# EAGLE board OldBoard (EAGLE 5.07)
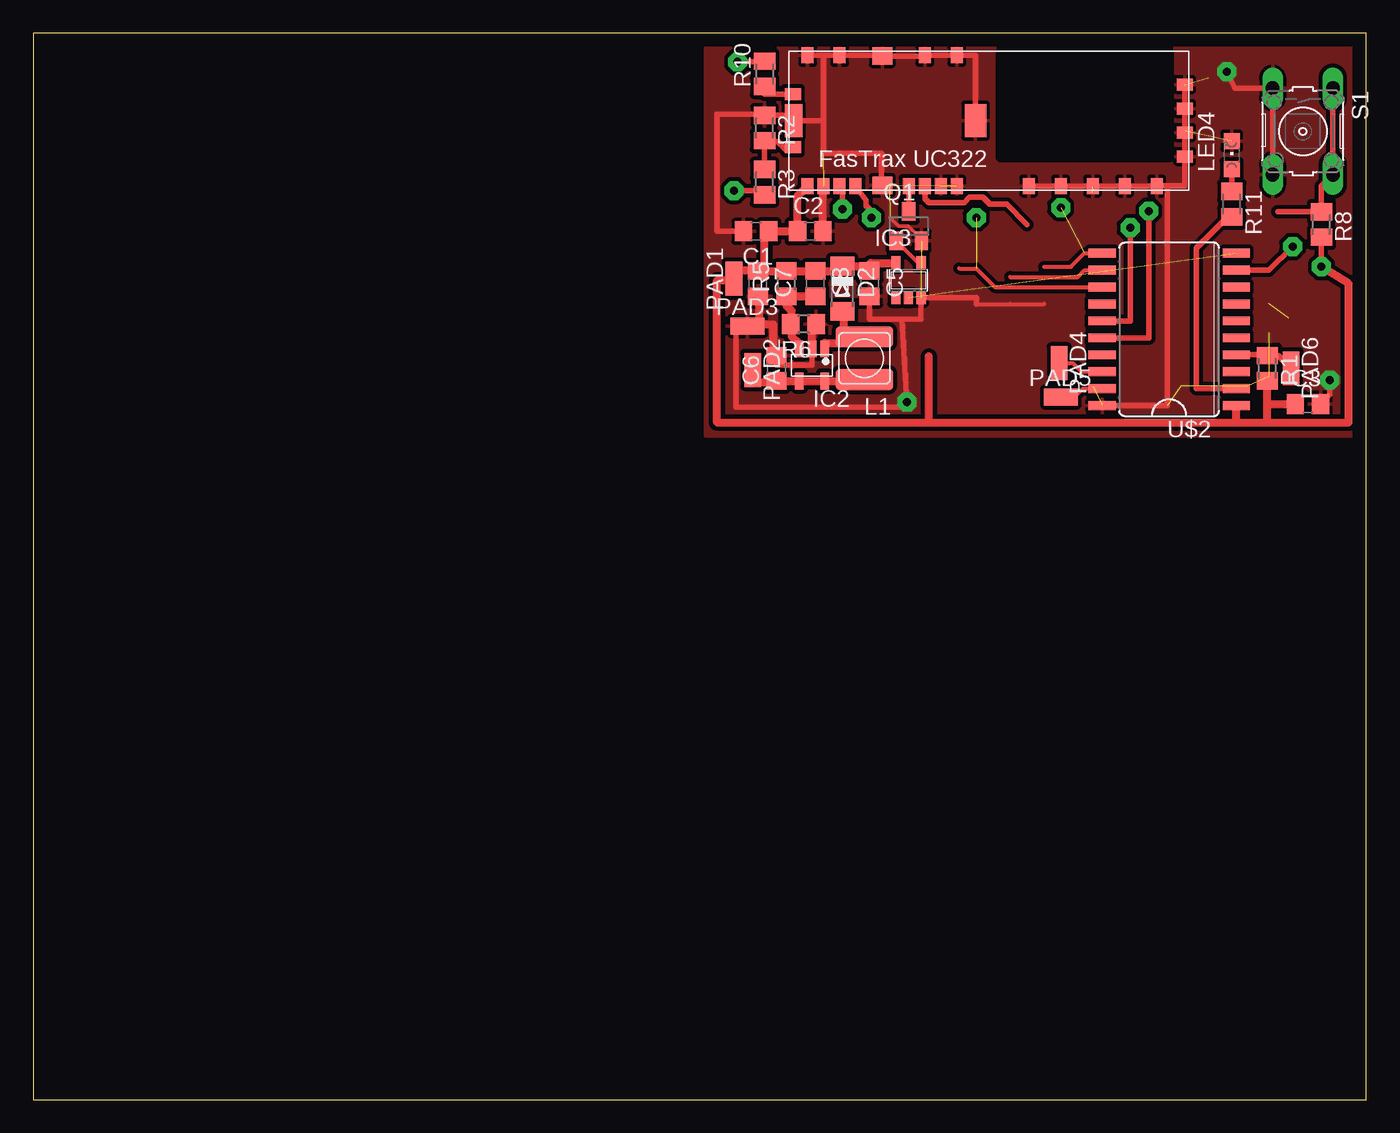
[diagram p0: board, top side]
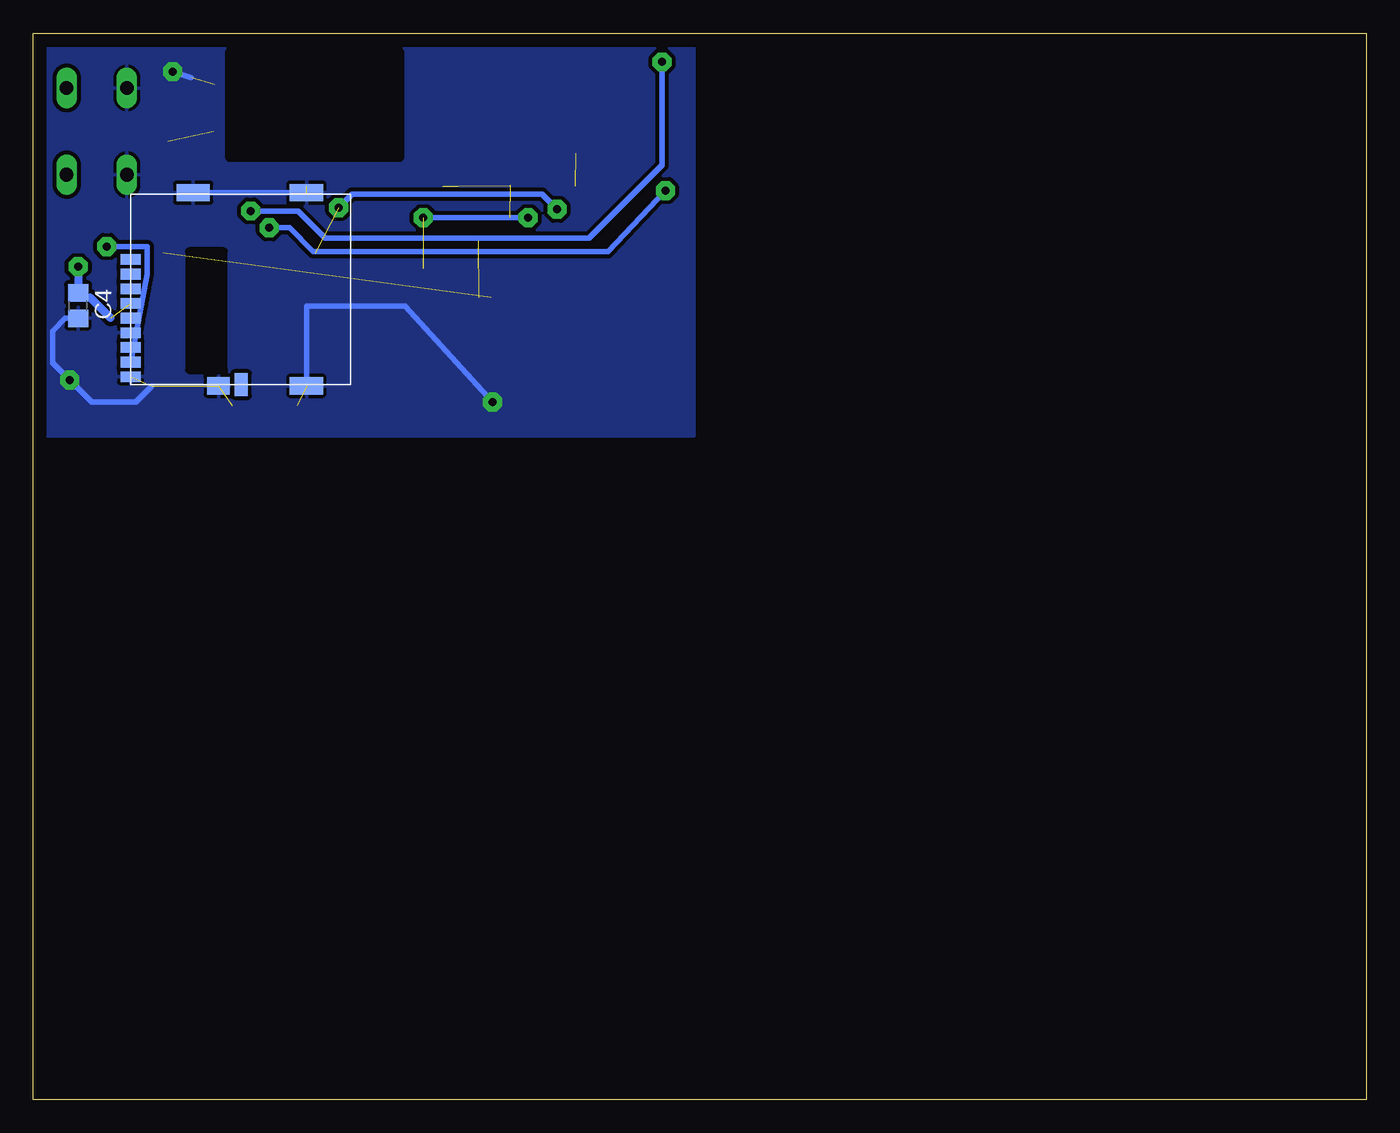
[diagram p1: board, bottom side, seen from below]

Size 100 x 80 mm. Coordinates in mm from the lower left corner, seen from the top.
Outline: 0,0 100,0 100,80 0,80 0,0
Copper layers (1*16): Top 0.035mm / dielectric 1.5mm / Bottom 0.035mm
Design rules "default *": minimum track width 12mil, minimum drill 0.6mm, track to track 12mil, track to pad 12mil, pad to pad 12mil, via to via 12mil, smd to smd 12mil, copper to edge 40mil, drill to drill 8mil, minimum pad ring 10mil, minimum via ring 8mil, stop-mask expansion 4mil, vias tented up to drill 0mil, thermal gap 10mil

## Footprints (pad centres in the part's own frame; a part is rotated, then mirrored left to right if it is on the bottom)
C0805 = smd 1.3 x 1.5: 1 -0.95,0; 2 0.95,0
MINIMELF = smd 1.4 x 1.8: A 1.7,0; C -1.7,0
SOT23-5 = smd 0.635 x 1.27: P$1 -0.953,-1.206; P$2 0,-1.206; P$3 0.953,-1.206; P$4 0.953,1.206; P$5 -0.953,1.206
SOT23-5' = smd 0.69 x 0.99: 1 -0.95,-1.29; 2 0,-1.29; 3 0.95,-1.29; 4 0.95,1.3; 5 -0.95,1.3
WE-TPC = smd 4.3 x 1.6: P$1 0,1.6; P$2 0,-1.6
CHIPLED_0805 = smd 1.2 x 1.2: A 0,-1.05; C 0,1.05
SMD1,27-2,54 = smd 1.27 x 2.54: 1 0,0
SOT23 = smd 1 x 1.4: 1 -0.95,-1.1; 2 0.95,-1.1; 3 0,1.1
M0805 = smd 1.3 x 1.6: 1 -0.95,0; 2 0.95,0
R0805 = smd 1.3 x 1.5: 1 -0.95,0; 2 0.95,0
B3F-10XX = drill 1.016 long: 1 -3.251,2.261; 2 3.251,2.261; 3 -3.251,-2.261; 4 3.251,-2.261
FASTRAXUC322 = smd 0.9 x 1.2: 1 1.7,0.6; 2 2.9,0.6; 3 4.1,0.6; 4 5.3,0.6; 6 9.3,0.6; 7 10.5,0.6; 8 11.7,0.6; 9 12.9,0.6; 11 18.3,0.6; 12 20.7,0.6; 13 23.1,0.6; 14 25.5,0.6; 15 27.9,0.6; 20 12.9,10.4; 21 10.5,10.4; 23 4.1,10.4; 24 1.7,10.4 | smd 1.5 x 1.3: 5 7.3,0.65; 22 7.3,10.35 | smd 1.6 x 2.5: 10 14.3,5.5 | smd 1.2 x 0.9: 16 30,2.8; 17 30,4.6; 18 30,6.4; 19 30,8.2; 25 0.6,7.5; 27 0.6,3.5 | smd 1.3 x 2.5: 26 0.65,5.5
SO20W = smd 0.66 x 2.032: 1 -5.715,-5.029; 2 -4.445,-5.029; 3 -3.175,-5.029; 4 -1.905,-5.029; 5 -0.635,-5.029; 6 0.635,-5.029; 7 1.905,-5.029; 8 3.175,-5.029; 9 4.445,-5.029; 10 5.715,-5.029; 11 5.715,5.029; 12 4.445,5.029; 13 3.175,5.029; 14 1.905,5.029; 15 0.635,5.029; 16 -0.635,5.029; 17 -1.905,5.029; 18 -3.175,5.029; 19 -4.445,5.029; 20 -5.715,5.029
MIKRO_SD_CARD_HOLDER = smd 1.7 x 1: C_DETECT1 14.3,8.3 | smd 0.8 x 1.5: C_DETECT2 13.71,0; P1 4.91,0; P2 6.01,0; P3 7.11,0; P4 8.21,0; P5 9.31,0; P6 10.41,0; P7 11.51,0; P8 12.61,0 | smd 1.3 x 2.5: CASE1 -0.1,4.7; CASE2 -0.1,13.2; CASE3 14.4,13.2 | smd 1.3 x 1.7: CASE4 14.4,6.6

## Placement (x,y rotation side)
C1  4.7uF  [C0805]  54.23,65.15 180 top
C2  10nF  [C0805]  58.29,65.15 0 top
C3  100nF  [C0805]  95.63,52.2 0 top
C4  100nF  [C0805]  96.65,59.56 270 bottom
C5  100nF  [C0805]  62.74,61.21 270 top
C6  4µ7 (ker)  [C0805]  55.75,54.86 90 top
C7  4µ7 (ker)  [C0805]  54.36,61.21 270 top
C8  1n  [C0805]  58.67,61.21 270 top
D2  [MINIMELF]  60.71,60.83 270 top
IC2  XC9119D10A  [SOT23-5]  58.42,55.12 180 top
IC3  74LVC1G04DBV  [SOT23-5']  65.66,61.47 0 top
L1  10u  [WE-TPC]  62.36,55.63 180 top
LED4  [CHIPLED_0805]  89.92,70.87 0 top
PAD1  [SMD1,27-2,54]  52.58,61.59 0 top
PAD2  [SMD1,27-2,54]  53.98,54.74 180 top
PAD3  [SMD1,27-2,54]  53.59,58.04 270 top
PAD4  [SMD1,27-2,54]  76.96,55.24 180 top
PAD5  [SMD1,27-2,54]  77.09,52.7 270 top
PAD6  [SMD1,27-2,54]  94.36,54.86 180 top
Q1  BSS123  [SOT23]  65.68,65.53 0 top
R1  10K  [M0805]  92.58,54.86 270 top
R2  10K  [M0805]  54.86,72.9 270 top
R3  10K  [M0805]  54.86,68.83 270 top
R5  300k  [R0805]  56.52,61.21 90 top
R6  130k  [R0805]  57.78,58.17 180 top
R8  10K  [M0805]  96.65,65.66 270 top
R10  10K  [M0805]  54.86,76.96 90 top
R11  10k  [M0805]  89.92,67.18 270 top
S1  [B3F-10XX]  95.25,72.64 270 top
U$1  FASTRAXUC322  [FASTRAXUC322]  56.39,67.94 0 top
U$2  PIC18F14K50_DIP20  [SO20W]  85.22,57.78 90 top
U$3  MIKRO_SD_CARD  [MIKRO_SD_CARD_HOLDER]  92.71,67.94 270 bottom

## Library data of the parts
C1-C8 R5 R6 = rcl
D2 = diode
IC2 = 00 Meine Bauteile
IC3 = 74xx-little-de
L1 U$3 = Parts_for_Marcus
LED4 = led
PAD1-PAD6 = wirepad
Q1 = transistor-small-signal
R1-R3 R8 R10 R11 = resistor
S1 = switch-omron
U$1 U$2 = MyLib

## Nets
CMD/DI:3: U$3.P3
DO: U$2.9 U$3.P8
GND: C1.2 C2.2 C3.2 C4.2 C5.2 C6.2 C7.2 IC2.P$2 IC3.3 LED4.C PAD3.1 Q1.2 R2.1 R6.1 S1.3 S1.4 U$1.5 U$1.8 U$1.9 U$1.10 U$1.11 U$1.12 U$1.13 U$1.14 U$1.15 U$1.16 U$1.17 U$1.18 U$1.19 U$1.20 U$1.21 U$1.22 U$1.23 U$1.24 U$1.26 U$2.20 U$3.C_DETECT2 U$3.CASE1 U$3.CASE2 U$3.CASE3 U$3.CASE4 U$3.P6
N$1: PAD6.1 R1.1 U$2.4
N$2: IC3.2 U$2.10
N$3: PAD4.1 U$2.18
N$5: U$2.12
N$6: R2.2 R3.1 U$1.27
N$7: R10.2 U$2.16
N$8: U$1.3 U$2.11
N$9: D2.A IC2.P$1 L1.P$2
N$10: C8.2 IC2.P$3 R5.1 R6.2
N$11: IC3.4 Q1.1
N$13: U$1.4 U$2.13
N$14: Q1.3 U$1.6
N$15: PAD5.1 U$2.19
N$17: U$1.7
N$19: R3.2 U$2.15
N$21: R8.1 S1.1 S1.2
N$25: R11.2 U$2.2
N$27: R10.1 U$1.25
N$30: LED4.A R11.1
VBAT: C6.1 IC2.P$4 IC2.P$5 L1.P$1 PAD2.1
VDD: C1.1 C2.1 C3.1 C4.1 C5.1 C7.1 C8.1 D2.C IC3.5 PAD1.1 R1.2 R5.2 R8.2 U$1.1 U$2.1 U$3.P4

## Tracks (layer width: path | path; a pad name or v marks a point on that pad's centre or on a via)
DO  (via drill 0.6 pad 1.42)
  Top 0.406: v94.49,64.01 92.71,62.23 U$2.9
  Bottom 0.406: U$3.P8 91.44,61.94 91.44,64.01 v94.49,64.01
GND  (via drill 0.6 pad 1.42)  (13 unrouted)
  Top 0.254: 66.63,64.56 65.66,65.53 64.9,65.53 64.26,66.17
  Top 0.305: 66.63,64.56 Q1.2 | 64.26,68.58 64.25,68.59 U$1.5 | 70.74,59.69 73.28,59.69 75.82,59.69
  Top 0.406: IC2.P$2 58.42,55.12 55.75,55.12 C6.2 | 58.42,57.72 R6.1 58.8,58.17 58.8,58.29 | U$1.23 60.49,78.3 | C5.2 62.74,58.55 65.15,58.55 | 65.15,58.55 66.61,58.55 IC3.3 70.74,60.18 70.74,59.69 | 65.15,58.55 v65.53,52.32 65.15,51.94 52.7,51.94 52.7,58.04 | U$2.20 85.09,52.07 85.09,68.58 | 85.09,68.58 84.29,68.58 U$1.15 U$1.14 U$1.13 U$1.12 U$1.11 | 85.09,68.58 86.39,68.58 U$1.16 U$1.17 | U$1.17 U$1.18 U$1.19 | U$1.10 70.69,78.34 U$1.20 U$1.21 66.89,78.3 U$1.22 63.69,78.34 U$1.23 | 59.44,78.34 U$1.23 | 59.44,78.34 U$1.24 | 59.29,73.44 59.29,70.99 63.63,70.99 63.63,68.66 U$1.5 | 59.29,73.44 U$1.26 57.04,73.97 56.91,73.85 R2.1 54.86,73.91 51.31,73.91 51.31,65.15 C1.2 | 59.29,73.44 59.29,78.2 59.44,78.34 | 96.65,52.14 C3.2 97.28,52.9 v97.28,53.98 | U$1.17 86.49,72.64 | S1.4 S1.3 90.14,75.89 v89.53,77.13
  Top 0.61: 54.61,58.17 PAD3.1 52.7,58.04 | 54.61,58.17 54.48,58.17 54.48,60.14 C7.2 54.61,60.26 | 54.61,58.17 55.5,58.17 55.5,55.81 C6.2 | 59.31,68.52 59.31,68.33 59.24,68.26 C2.2 | IC2.P$2 58.42,57.72
  Bottom 0.406: U$3.CASE2 U$3.CASE1 | 96.71,58.36 C4.2 97.6,58.61 98.55,57.66 98.55,55.24 v97.28,53.98 95.63,52.32 92.33,52.32 91.11,53.55 | v89.53,77.13 88.14,76.67 | U$3.CASE3 79.51,59.55 72.12,59.55 v65.53,52.32
  pour Top (isolate 0.305): 50.42,49.78 50.42,79.76 99.82,79.76 99.82,49.78
  pour Bottom (isolate 0.305): 50.42,79.76 50.42,49.78 99.82,49.78 99.82,79.76
N$1
  Top 0.406: U$2.4 92.58,55.88 R1.1 93.41,55.81 PAD6.1
N$2  (1 unrouted)
N$3
  Top 0.305: PAD4.1 77.98,55.24 78.61,54.61 U$2.18
  Top 0.406: PAD4.1 76.83,55.37
N$5
  Top 0.305: 73.28,61.72 78.36,61.72 78.87,62.23 U$2.12
N$6
  Top 0.305: U$1.27 56.99,71.25 56.9,71.25 56.9,71.31
  Top 0.406: 54.86,71.25 R3.1 R2.2 54.93,71.88 55.88,71.88 56.52,71.25 56.79,71.25 arc90 U$1.27
N$7  (via drill 0.6 pad 1.42)
  Top 0.406: R10.2 54.86,77.85 v52.83,77.85 | v83.69,66.67 83.69,57.15 U$2.16
  Bottom 0.406: v52.83,77.85 52.83,70.1 58.29,64.64 78.11,64.64 80.14,66.67 v83.69,66.67
N$8  (via drill 0.6 pad 1.42)  (1 unrouted)
  Top 0.305: 75.82,62.48 77.85,62.48 78.87,63.5 U$2.11
  Top 0.406: U$1.3 60.71,68.33 v60.71,66.8
  Bottom 0.406: v60.71,66.8 61.85,67.94 76.07,67.94 v77.09,66.93
N$9
  Top 0.61: IC2.P$1 59.37,56.77 60.71,56.77 60.71,57.23 L1.P$2 62.36,57.15 60.83,57.15 60.83,59.01 D2.A
N$10
  Top 0.61: C8.2 R5.1 56.52,59.56 56.9,59.18 56.9,58.23 R6.2 | R6.2 56.64,58.17 | IC2.P$3 57.47,56.71 56.9,57.28 56.9,58.1 R6.2
N$11
  Top 0.305: IC3.4 66.4,62.77 Q1.1
N$13  (via drill 0.6 pad 1.42)  (1 unrouted)
  Top 0.305: U$2.13 72.14,60.96 70.74,62.36 69.47,62.36
  Top 0.406: U$1.4 62.48,67.5 62.48,67.06 62.87,66.67 v62.87,66.17
  Bottom 0.406: v62.87,66.17 v70.74,66.17
N$14
  Top 0.406: 65.69,66.76 Q1.3 U$1.6
N$15
  Top 0.305: PAD5.1 78.11,52.7 78.74,53.34 U$2.19
  Top 0.406: PAD5.1 76.96,52.58
N$17
  Top 0.406: U$1.7 66.89,67.61 67.18,67.31 69.85,67.31 70.23,67.69 71.25,67.69 71.75,67.18 73.03,67.18 74.55,65.66
N$19  (via drill 0.6 pad 1.42)
  Top 0.406: R3.2 54.86,68.2 v52.58,68.2 | v82.3,65.41 82.3,58.42 U$2.15
  Bottom 0.406: v82.3,65.41 80.77,65.41 78.99,63.63 56.9,63.63 v52.58,68.2
N$21
  Top 0.406: S1.1 S1.2 96.65,68.53 R8.1 93.36,66.61
N$25
  Top 0.406: R11.2 89.6,66.23 87.25,63.88 87.25,53.34 U$2.2
N$27
  Top 0.406: R10.1 54.86,75.44 U$1.25
N$30
  Top 0.406: R11.1 LED4.A
VBAT
  Top 0.61: L1.P$1 62.36,54.1 62.48,54.1 62.48,53.91 IC2.P$5 IC2.P$4 C6.1 55.75,53.85 53.98,53.85 PAD2.1
VDD  (via drill 0.6 pad 1.42)  (1 unrouted)
  Top 0.406: C5.1 arc-90 62.83,62.77 | C1.1 55.12,65.09 | v96.65,62.48 R8.2
  Top 0.61: 54.86,62.23 C7.1 R5.2 C8.1 60.96,62.16 D2.C 62.99,62.53 C5.1 | 54.86,62.23 52.58,62.23 PAD1.1 52.45,61.47 51.31,61.47 51.31,50.8 67.18,50.8 | 62.83,62.77 IC3.5 | 92.58,52.2 C3.1 | 92.58,52.2 R1.2 | 67.18,50.8 67.18,55.75 | 90.25,50.8 U$2.1 | U$1.1 57.34,67.8 C2.1 C1.1 54.86,64.84 54.86,62.23 | 67.18,50.8 90.25,50.8 | 90.25,50.8 92.58,50.8 | 92.58,50.8 98.68,50.8 98.68,61.21 v96.65,62.48 | 92.58,50.8 92.58,52.2
  Bottom 0.61: 94.19,58.63 95.76,60.2 96.59,60.2 C4.1 v96.65,62.48